# Altium PCB ARDUINO DUE V2_2021-11-28.pcbdoc
Units mil, origin at the board's own origin, x right, y up, seen from the top; angles counter-clockwise.
Board outline 5079.99 x 3120 mil, 2 copper layers (Top Layer, Bottom Layer); 1 components, 78 nets, 91 pads, 0 vias.
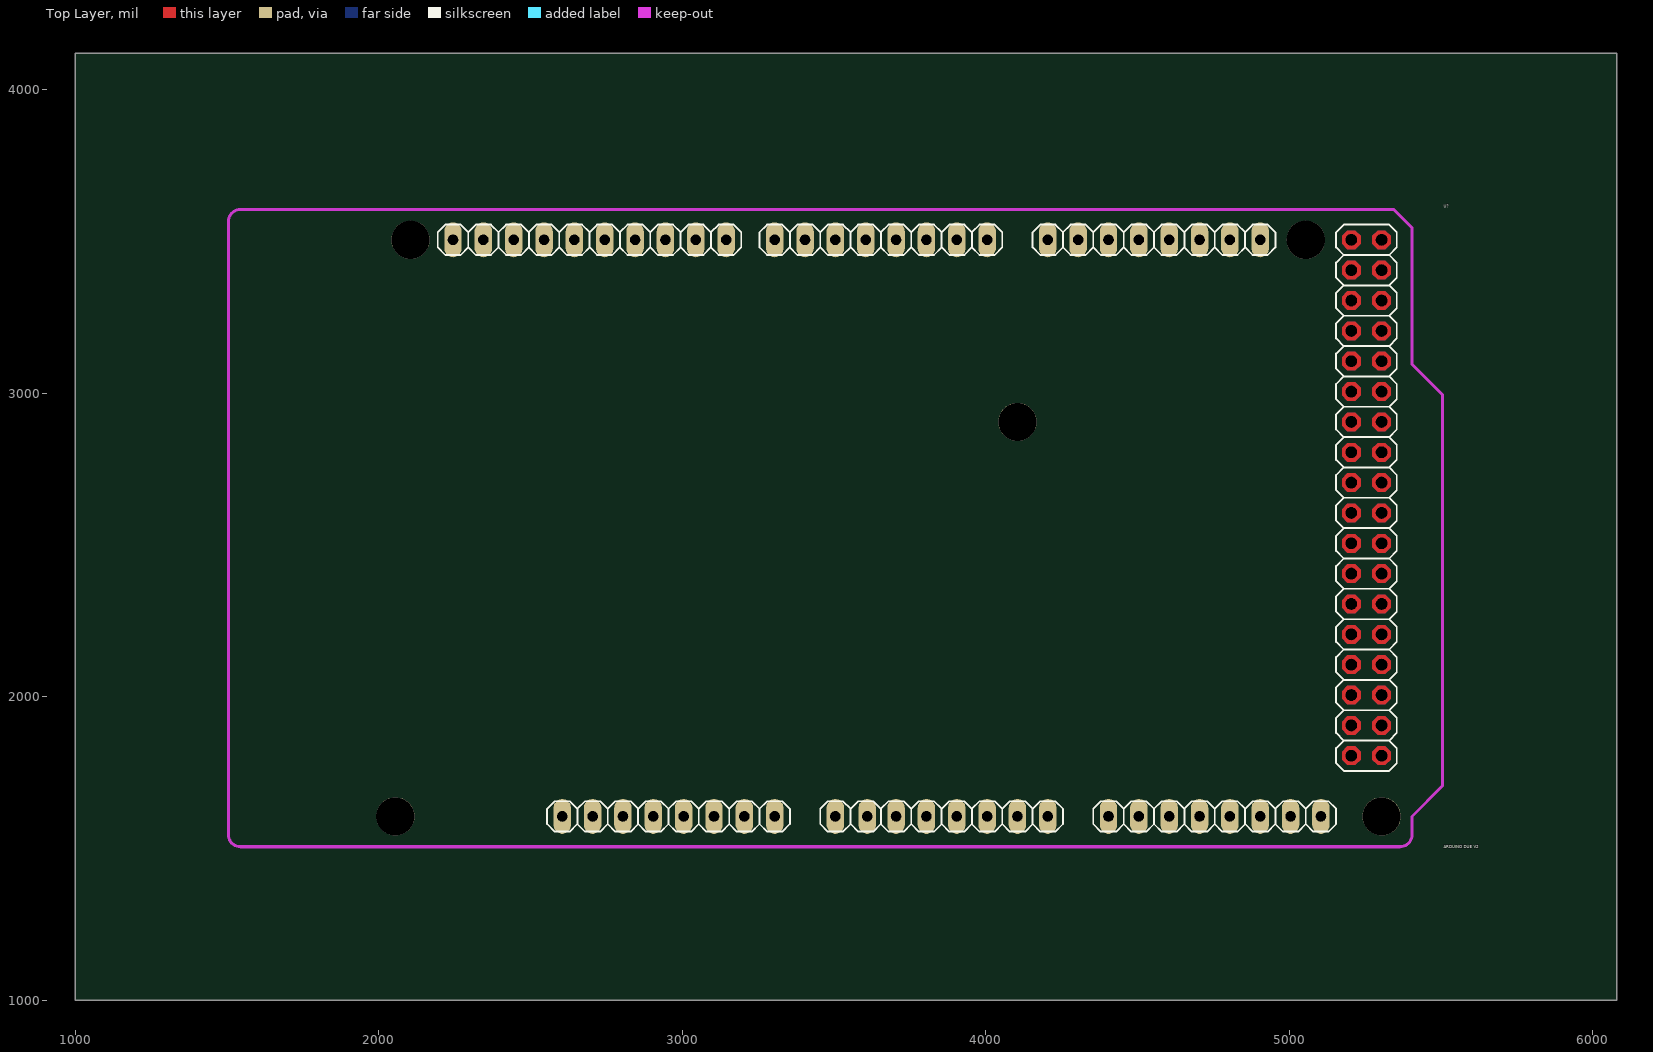
[diagram p0: Top Layer view]
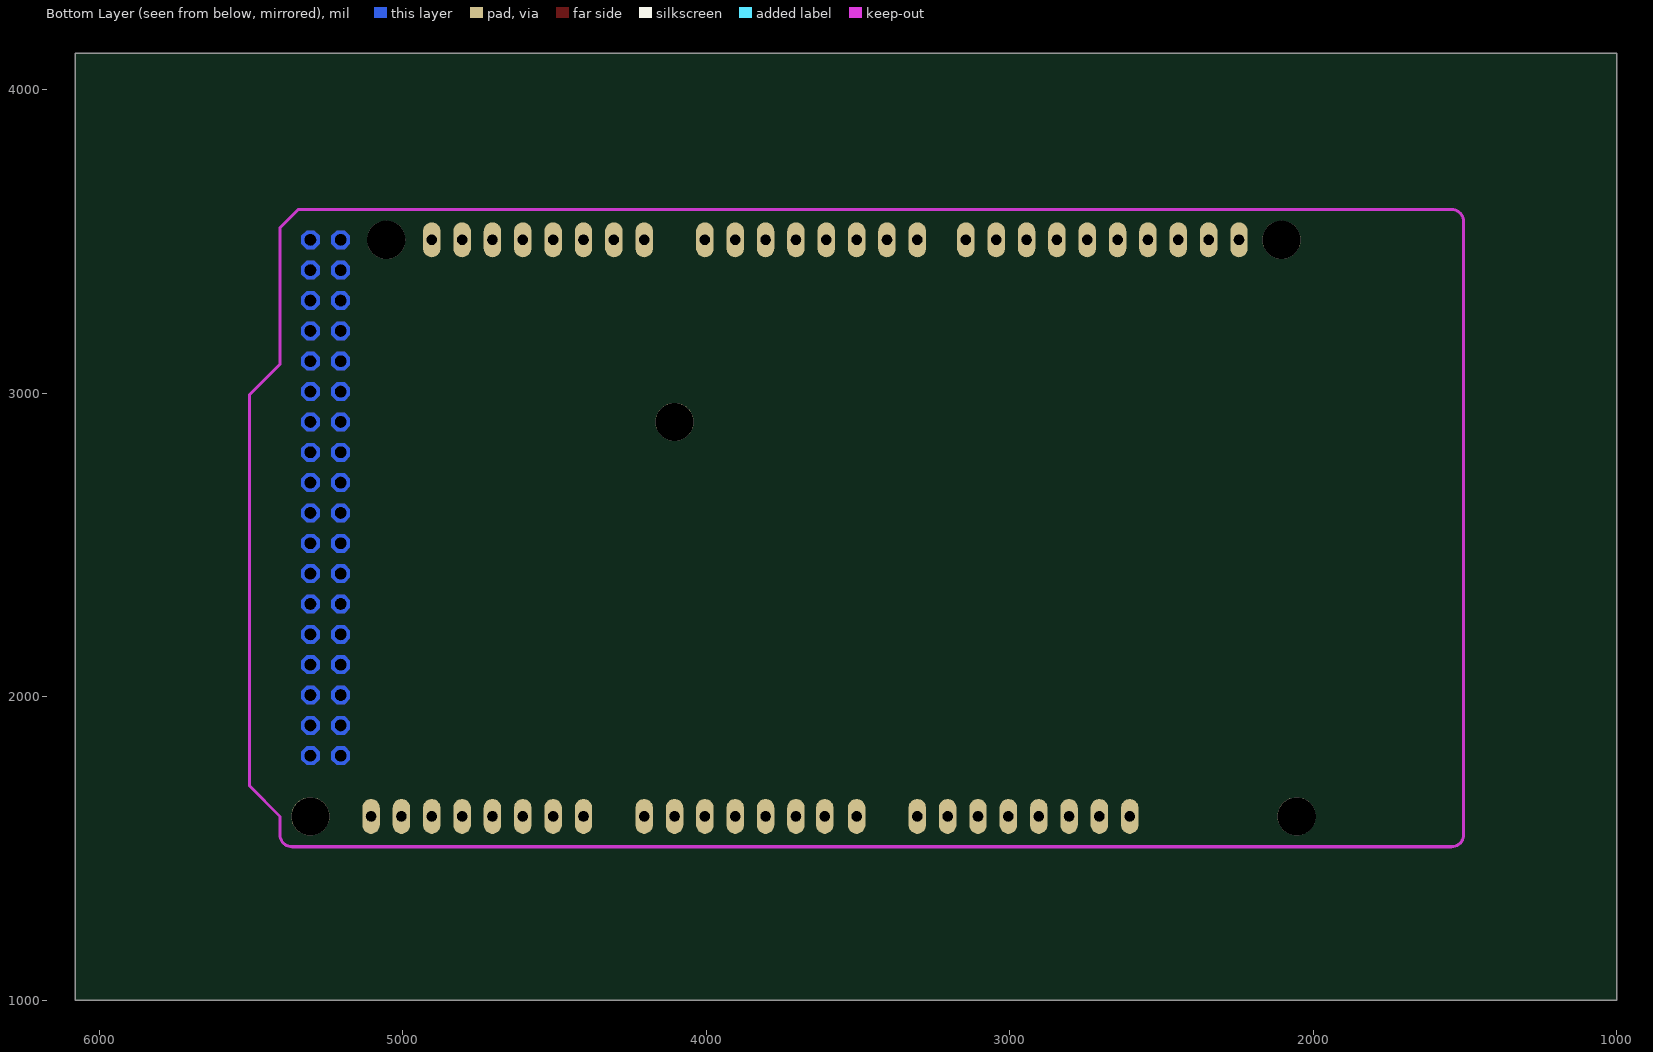
[diagram p1: Bottom Layer view, seen from below]

## Layer stack, top to bottom
Top Layer: signal copper (thickness not stored)
Dielectric: dielectric 12.6, FR-4, Dk 4.8
Bottom Layer: signal copper (thickness not stored)

## Board outline
6079.99,1000 1000,1000 1000,4120 6079.99,4120

## Components (designator, comment, footprint, x,y, rotation, side; value= is the part's Value field where it differs from the comment)
U? "ARDUINO DUE V2" "ARDUINO DUE V2" 3504.99,2555 r0 top

## Footprints (in the part's own frame and the unit in brackets; to place one, negate y for a bottom-side part, rotate by r counter-clockwise, add the part's x,y. Pads: shape width x height; smd on the part's side, far side on the other; paste and mask are expansions set on the pad)
"ARDUINO DUE V2" [mil]
  oval 57.46x114.93 hole 33.46 slot 33.66 at 90 deg: 0(499.99,950) 1(400.01,950) 2(300.01,950) 3(200.01,950) 3V3(-599.99,-950) 4(100.01,950) 5(0.01,950) 5V0@0(-499.99,-950) 6(-99.99,950) 7(-199.99,950) 8(-359.99,950) 9(-459.99,950) 10(-559.99,950) 11(-659.99,950) 12(-759.99,950) 13(-859.99,950) 14(699.99,950) 15(799.99,950) 16(899.99,950) 17(999.99,950) 18(1099.99,950) 19(1199.99,950) 20(1299.99,950) 21(1399.99,950) A0(0.01,-950) A1(105.01,-950) A2(200.01,-950) A3(300.01,-950) A4(400.01,-950) A5(499.99,-950) A6(599.99,-950) A7(699.99,-950) A8(899.99,-950) A9(999.99,-950) A10(1099.99,-950) A11(1199.99,-950) A12(1299.99,-950) A13(1399.99,-950) A14(1499.99,-950) A15(1599.99,-950) AREF(-1059.99,950) GND@0(-399.99,-950) GND@1(-299.99,-950) GND@4(-959.99,950) IOREF(-799.99,-950) RESET(-699.99,-950) RFU(-899.99,-950) SCL1(-1259.99,950) SDA1(-1159.99,950) VIN(-199.99,-950)
  round 0 hole 37.4 slot 37.6 at 90 deg: 5V0@1(1800.01,950) 5V0@2(1700.01,950) 22(1699.99,850) 23(1799.99,850) 24(1699.99,750) 25(1799.99,750) 26(1699.99,650) 27(1799.99,650) 28(1699.99,550) 29(1799.99,550) 30(1699.99,450) 31(1799.99,450) 32(1699.99,350) 33(1799.99,350) 34(1699.99,250) 35(1799.99,250) 36(1699.99,150) 37(1799.99,150) 38(1699.99,50) 39(1799.99,50) 40(1699.99,-50) 41(1799.99,-50) 42(1699.99,-150) 43(1799.99,-150) 44(1699.99,-250) 45(1799.99,-250) 46(1699.99,-350) 47(1799.99,-350) 48(1699.99,-450) 49(1799.99,-450) 50(1699.99,-550) 51(1799.99,-550) 52(1699.99,-650) 53(1799.99,-650) GND@2(1699.99,-750) GND@3(1799.99,-750)
  round 125.98 hole 125.98 unplated: ""(-1449.99,-950) ""(-1399.99,950) ""(600.01,350) ""(1550.01,950) ""(1800.01,-950)
  Top Layer region: 1712.62,919.51 1730.48,937.37 1730.48,962.62 1712.62,980.48 1687.36,980.48 1669.51,962.62 1669.51,937.37 1687.36,919.51
  Top Layer region: 1812.62,919.51 1830.48,937.37 1830.48,962.62 1812.62,980.48 1787.36,980.48 1769.51,962.62 1769.51,937.37 1787.36,919.51
  Top Layer region: 1712.62,819.51 1730.48,837.37 1730.48,862.62 1712.62,880.48 1687.36,880.48 1669.51,862.62 1669.51,837.37 1687.36,819.51
  Top Layer region: 1812.62,819.51 1830.48,837.37 1830.48,862.62 1812.62,880.48 1787.36,880.48 1769.51,862.62 1769.51,837.37 1787.36,819.51
  Top Layer region: 1712.62,719.51 1730.48,737.37 1730.48,762.62 1712.62,780.48 1687.36,780.48 1669.51,762.62 1669.51,737.37 1687.36,719.51
  Top Layer region: 1812.62,719.51 1830.48,737.37 1830.48,762.62 1812.62,780.48 1787.36,780.48 1769.51,762.62 1769.51,737.37 1787.36,719.51
  Top Layer region: 1712.62,619.51 1730.48,637.37 1730.48,662.63 1712.62,680.48 1687.36,680.48 1669.51,662.63 1669.51,637.37 1687.36,619.51
  Top Layer region: 1812.62,619.51 1830.48,637.37 1830.48,662.63 1812.62,680.48 1787.36,680.48 1769.51,662.63 1769.51,637.37 1787.36,619.51
  Top Layer region: 1712.62,519.51 1730.48,537.37 1730.48,562.63 1712.62,580.48 1687.36,580.48 1669.51,562.63 1669.51,537.37 1687.36,519.51
  Top Layer region: 1812.62,519.51 1830.48,537.37 1830.48,562.63 1812.62,580.48 1787.36,580.48 1769.51,562.63 1769.51,537.37 1787.36,519.51
  Top Layer region: 1712.62,419.51 1730.48,437.37 1730.48,462.63 1712.62,480.48 1687.36,480.48 1669.51,462.63 1669.51,437.37 1687.36,419.51
  Top Layer region: 1812.62,419.51 1830.48,437.37 1830.48,462.63 1812.62,480.48 1787.36,480.48 1769.51,462.63 1769.51,437.37 1787.36,419.51
  Top Layer region: 1712.62,319.51 1730.48,337.37 1730.48,362.63 1712.62,380.49 1687.36,380.49 1669.51,362.63 1669.51,337.37 1687.36,319.51
  Top Layer region: 1812.62,319.51 1830.48,337.37 1830.48,362.63 1812.62,380.49 1787.36,380.49 1769.51,362.63 1769.51,337.37 1787.36,319.51
  Top Layer region: 1712.62,219.51 1730.48,237.37 1730.48,262.63 1712.62,280.49 1687.36,280.49 1669.51,262.63 1669.51,237.37 1687.36,219.51
  Top Layer region: 1812.62,219.51 1830.48,237.37 1830.48,262.63 1812.62,280.49 1787.36,280.49 1769.51,262.63 1769.51,237.37 1787.36,219.51
  Top Layer region: 1712.62,119.51 1730.48,137.37 1730.48,162.63 1712.62,180.49 1687.36,180.49 1669.51,162.63 1669.51,137.37 1687.36,119.51
  Top Layer region: 1812.62,119.51 1830.48,137.37 1830.48,162.63 1812.62,180.49 1787.36,180.49 1769.51,162.63 1769.51,137.37 1787.36,119.51
  Top Layer region: 1712.62,19.51 1730.48,37.37 1730.48,62.63 1712.62,80.49 1687.36,80.49 1669.51,62.63 1669.51,37.37 1687.36,19.51
  Top Layer region: 1812.62,19.51 1830.48,37.37 1830.48,62.63 1812.62,80.49 1787.36,80.49 1769.51,62.63 1769.51,37.37 1787.36,19.51
  Top Layer region: 1712.62,-80.49 1730.48,-62.63 1730.48,-37.37 1712.62,-19.51 1687.36,-19.51 1669.51,-37.37 1669.51,-62.63 1687.36,-80.49
  Top Layer region: 1812.62,-80.49 1830.48,-62.63 1830.48,-37.37 1812.62,-19.51 1787.36,-19.51 1769.51,-37.37 1769.51,-62.63 1787.36,-80.49
  Top Layer region: 1712.62,-180.49 1730.48,-162.63 1730.48,-137.37 1712.62,-119.51 1687.36,-119.51 1669.51,-137.37 1669.51,-162.63 1687.36,-180.49
  Top Layer region: 1812.62,-180.49 1830.48,-162.63 1830.48,-137.37 1812.62,-119.51 1787.36,-119.51 1769.51,-137.37 1769.51,-162.63 1787.36,-180.49
  Top Layer region: 1712.62,-280.49 1730.48,-262.63 1730.48,-237.37 1712.62,-219.51 1687.36,-219.51 1669.51,-237.37 1669.51,-262.63 1687.36,-280.49
  Top Layer region: 1812.62,-280.49 1830.48,-262.63 1830.48,-237.37 1812.62,-219.51 1787.36,-219.51 1769.51,-237.37 1769.51,-262.63 1787.36,-280.49
  Top Layer region: 1712.62,-380.49 1730.48,-362.63 1730.48,-337.37 1712.62,-319.51 1687.36,-319.51 1669.51,-337.37 1669.51,-362.63 1687.36,-380.49
  Top Layer region: 1812.62,-380.49 1830.48,-362.63 1830.48,-337.37 1812.62,-319.51 1787.36,-319.51 1769.51,-337.37 1769.51,-362.63 1787.36,-380.49
  Top Layer region: 1712.62,-480.49 1730.48,-462.63 1730.48,-437.37 1712.62,-419.51 1687.36,-419.51 1669.51,-437.37 1669.51,-462.63 1687.36,-480.49
  Top Layer region: 1812.62,-480.49 1830.48,-462.63 1830.48,-437.37 1812.62,-419.51 1787.36,-419.51 1769.51,-437.37 1769.51,-462.63 1787.36,-480.49
  Top Layer region: 1712.62,-580.49 1730.48,-562.63 1730.48,-537.37 1712.62,-519.51 1687.36,-519.51 1669.51,-537.37 1669.51,-562.63 1687.36,-580.49
  Top Layer region: 1812.62,-580.49 1830.48,-562.63 1830.48,-537.37 1812.62,-519.51 1787.36,-519.51 1769.51,-537.37 1769.51,-562.63 1787.36,-580.49
  Top Layer region: 1712.62,-680.49 1730.48,-662.63 1730.48,-637.37 1712.62,-619.51 1687.36,-619.51 1669.51,-637.37 1669.51,-662.63 1687.36,-680.49
  Top Layer region: 1812.62,-680.49 1830.48,-662.63 1830.48,-637.37 1812.62,-619.51 1787.36,-619.51 1769.51,-637.37 1769.51,-662.63 1787.36,-680.49
  Top Layer region: 1712.62,-780.49 1730.48,-762.63 1730.48,-737.37 1712.62,-719.51 1687.36,-719.51 1669.51,-737.37 1669.51,-762.63 1687.36,-780.49
  Top Layer region: 1812.62,-780.49 1830.48,-762.63 1830.48,-737.37 1812.62,-719.51 1787.36,-719.51 1769.51,-737.37 1769.51,-762.63 1787.36,-780.49
  Bottom Layer region: 1712.62,919.51 1730.48,937.37 1730.48,962.62 1712.62,980.48 1687.36,980.48 1669.51,962.62 1669.51,937.37 1687.36,919.51
  Bottom Layer region: 1812.62,919.51 1830.48,937.37 1830.48,962.62 1812.62,980.48 1787.36,980.48 1769.51,962.62 1769.51,937.37 1787.36,919.51
  Bottom Layer region: 1712.62,819.51 1730.48,837.37 1730.48,862.62 1712.62,880.48 1687.36,880.48 1669.51,862.62 1669.51,837.37 1687.36,819.51
  Bottom Layer region: 1812.62,819.51 1830.48,837.37 1830.48,862.62 1812.62,880.48 1787.36,880.48 1769.51,862.62 1769.51,837.37 1787.36,819.51
  Bottom Layer region: 1712.62,719.51 1730.48,737.37 1730.48,762.62 1712.62,780.48 1687.36,780.48 1669.51,762.62 1669.51,737.37 1687.36,719.51
  Bottom Layer region: 1812.62,719.51 1830.48,737.37 1830.48,762.62 1812.62,780.48 1787.36,780.48 1769.51,762.62 1769.51,737.37 1787.36,719.51
  Bottom Layer region: 1712.62,619.51 1730.48,637.37 1730.48,662.63 1712.62,680.48 1687.36,680.48 1669.51,662.63 1669.51,637.37 1687.36,619.51
  Bottom Layer region: 1812.62,619.51 1830.48,637.37 1830.48,662.63 1812.62,680.48 1787.36,680.48 1769.51,662.63 1769.51,637.37 1787.36,619.51
  Bottom Layer region: 1712.62,519.51 1730.48,537.37 1730.48,562.63 1712.62,580.48 1687.36,580.48 1669.51,562.63 1669.51,537.37 1687.36,519.51
  Bottom Layer region: 1812.62,519.51 1830.48,537.37 1830.48,562.63 1812.62,580.48 1787.36,580.48 1769.51,562.63 1769.51,537.37 1787.36,519.51
  Bottom Layer region: 1712.62,419.51 1730.48,437.37 1730.48,462.63 1712.62,480.48 1687.36,480.48 1669.51,462.63 1669.51,437.37 1687.36,419.51
  Bottom Layer region: 1812.62,419.51 1830.48,437.37 1830.48,462.63 1812.62,480.48 1787.36,480.48 1769.51,462.63 1769.51,437.37 1787.36,419.51
  Bottom Layer region: 1712.62,319.51 1730.48,337.37 1730.48,362.63 1712.62,380.49 1687.36,380.49 1669.51,362.63 1669.51,337.37 1687.36,319.51
  Bottom Layer region: 1812.62,319.51 1830.48,337.37 1830.48,362.63 1812.62,380.49 1787.36,380.49 1769.51,362.63 1769.51,337.37 1787.36,319.51
  Bottom Layer region: 1712.62,219.51 1730.48,237.37 1730.48,262.63 1712.62,280.49 1687.36,280.49 1669.51,262.63 1669.51,237.37 1687.36,219.51
  Bottom Layer region: 1812.62,219.51 1830.48,237.37 1830.48,262.63 1812.62,280.49 1787.36,280.49 1769.51,262.63 1769.51,237.37 1787.36,219.51
  Bottom Layer region: 1712.62,119.51 1730.48,137.37 1730.48,162.63 1712.62,180.49 1687.36,180.49 1669.51,162.63 1669.51,137.37 1687.36,119.51
  Bottom Layer region: 1812.62,119.51 1830.48,137.37 1830.48,162.63 1812.62,180.49 1787.36,180.49 1769.51,162.63 1769.51,137.37 1787.36,119.51
  Bottom Layer region: 1712.62,19.51 1730.48,37.37 1730.48,62.63 1712.62,80.49 1687.36,80.49 1669.51,62.63 1669.51,37.37 1687.36,19.51
  Bottom Layer region: 1812.62,19.51 1830.48,37.37 1830.48,62.63 1812.62,80.49 1787.36,80.49 1769.51,62.63 1769.51,37.37 1787.36,19.51
  Bottom Layer region: 1712.62,-80.49 1730.48,-62.63 1730.48,-37.37 1712.62,-19.51 1687.36,-19.51 1669.51,-37.37 1669.51,-62.63 1687.36,-80.49
  Bottom Layer region: 1812.62,-80.49 1830.48,-62.63 1830.48,-37.37 1812.62,-19.51 1787.36,-19.51 1769.51,-37.37 1769.51,-62.63 1787.36,-80.49
  Bottom Layer region: 1712.62,-180.49 1730.48,-162.63 1730.48,-137.37 1712.62,-119.51 1687.36,-119.51 1669.51,-137.37 1669.51,-162.63 1687.36,-180.49
  Bottom Layer region: 1812.62,-180.49 1830.48,-162.63 1830.48,-137.37 1812.62,-119.51 1787.36,-119.51 1769.51,-137.37 1769.51,-162.63 1787.36,-180.49
  Bottom Layer region: 1712.62,-280.49 1730.48,-262.63 1730.48,-237.37 1712.62,-219.51 1687.36,-219.51 1669.51,-237.37 1669.51,-262.63 1687.36,-280.49
  Bottom Layer region: 1812.62,-280.49 1830.48,-262.63 1830.48,-237.37 1812.62,-219.51 1787.36,-219.51 1769.51,-237.37 1769.51,-262.63 1787.36,-280.49
  Bottom Layer region: 1712.62,-380.49 1730.48,-362.63 1730.48,-337.37 1712.62,-319.51 1687.36,-319.51 1669.51,-337.37 1669.51,-362.63 1687.36,-380.49
  Bottom Layer region: 1812.62,-380.49 1830.48,-362.63 1830.48,-337.37 1812.62,-319.51 1787.36,-319.51 1769.51,-337.37 1769.51,-362.63 1787.36,-380.49
  Bottom Layer region: 1712.62,-480.49 1730.48,-462.63 1730.48,-437.37 1712.62,-419.51 1687.36,-419.51 1669.51,-437.37 1669.51,-462.63 1687.36,-480.49
  Bottom Layer region: 1812.62,-480.49 1830.48,-462.63 1830.48,-437.37 1812.62,-419.51 1787.36,-419.51 1769.51,-437.37 1769.51,-462.63 1787.36,-480.49
  Bottom Layer region: 1712.62,-580.49 1730.48,-562.63 1730.48,-537.37 1712.62,-519.51 1687.36,-519.51 1669.51,-537.37 1669.51,-562.63 1687.36,-580.49
  Bottom Layer region: 1812.62,-580.49 1830.48,-562.63 1830.48,-537.37 1812.62,-519.51 1787.36,-519.51 1769.51,-537.37 1769.51,-562.63 1787.36,-580.49
  Bottom Layer region: 1712.62,-680.49 1730.48,-662.63 1730.48,-637.37 1712.62,-619.51 1687.36,-619.51 1669.51,-637.37 1669.51,-662.63 1687.36,-680.49
  Bottom Layer region: 1812.62,-680.49 1830.48,-662.63 1830.48,-637.37 1812.62,-619.51 1787.36,-619.51 1769.51,-637.37 1769.51,-662.63 1787.36,-680.49
  Bottom Layer region: 1712.62,-780.49 1730.48,-762.63 1730.48,-737.37 1712.62,-719.51 1687.36,-719.51 1669.51,-737.37 1669.51,-762.63 1687.36,-780.49
  Bottom Layer region: 1812.62,-780.49 1830.48,-762.63 1830.48,-737.37 1812.62,-719.51 1787.36,-719.51 1769.51,-737.37 1769.51,-762.63 1787.36,-780.49
  Keep-Out Layer lines w10: -1999.99,-1010.63 -1999.99,1010.63 ; -1960.62,-1050 1860.62,-1050 ; -1960.62,1050 1839.99,1050 1899.99,990 1899.99,540 1999.99,440 1999.99,-850 1899.99,-950 1899.99,-1010.63
  Keep-Out Layer lines w10: -1999.99,-1010.63 ccw(c-1960.62,-1010.63) -1960.62,-1050 ; -1999.99,1010.63 cw(c-1960.62,1010.63) -1960.62,1050 ; 1860.62,-1050 ccw(c1860.62,-1010.63) 1899.99,-1010.63
  silkscreen extent -1310,-1000 1850,1000

## Nets (pads, with @x,y where several pads share a name; then routed paths per layer and width w, separated by ;. In a path a pad name is that pad's centre, name@x,y a point inside that pad or via, vN(x,y) a via of type N, cw(c..) or ccw(c..) an arc to the next point about the centre after c; other vN are vias at no path point)
3V3: U?.3V3 U?.IOREF
5V: U?.5V0@0 U?.5V0@1 U?.5V0@2
AD0: U?.A0
AD1: U?.A1
AD2: U?.A2
AD3: U?.A3
AD4: U?.A4
AD5: U?.A5
AD6: U?.A6
AD7: U?.A7
AD8: U?.A8
AD9: U?.A9
AD10: U?.A10
AD11(TXD3): U?.A11
AD14(RXD3): U?.52
AREF: U?.AREF
CANRX0: U?.A14
CANTX0: U?.A15
CANTX1/IO: U?.53
DAC0(CANRX1): U?.A12
DAC1: U?.A13
GND: U?.GND@0 U?.GND@1 U?.GND@2 U?.GND@3 U?.GND@4
PIN22: U?.22
PIN23: U?.23
PIN24: U?.24
PIN25: U?.25
PIN26: U?.26
PIN27: U?.27
PIN28: U?.28
PIN29: U?.29
PIN30: U?.30
PIN31: U?.31
PIN32: U?.32
PIN33: U?.33
PIN34: U?.34
PIN35: U?.35
PIN36: U?.36
PIN37: U?.37
PIN38: U?.38
PIN39: U?.39
PIN40: U?.40
PIN41: U?.41
PIN42: U?.42
PIN43: U?.43
PIN44: U?.44
PIN45: U?.45
PIN46: U?.46
PIN47: U?.47
PIN48: U?.48
PIN49: U?.49
PIN50: U?.50
PIN51: U?.51
PWM2: U?.2
PWM3: U?.3
PWM5: U?.5
PWM6: U?.6
PWM7: U?.7
PWM8: U?.8
PWM9: U?.9
PWM11: U?.11
PWM12: U?.12
PWM13: U?.13
RESET: U?.RESET
RX: U?.0
RXD0: U?.15
RXD1: U?.17
RXD2: U?.19
SCL0-3: U?.21
SCL1: U?.SCL1
SDA0-3: U?.20
SDA1: U?.SDA1
SS0/PWM10: U?.10
SS1/PWM4: U?.4
TX: U?.1
TXD0: U?.14
TXD1: U?.16
TXD2: U?.18
VIN: U?.VIN
pads on no net: U?. U?.RFU